# EAGLE board power (EAGLE 5.10)
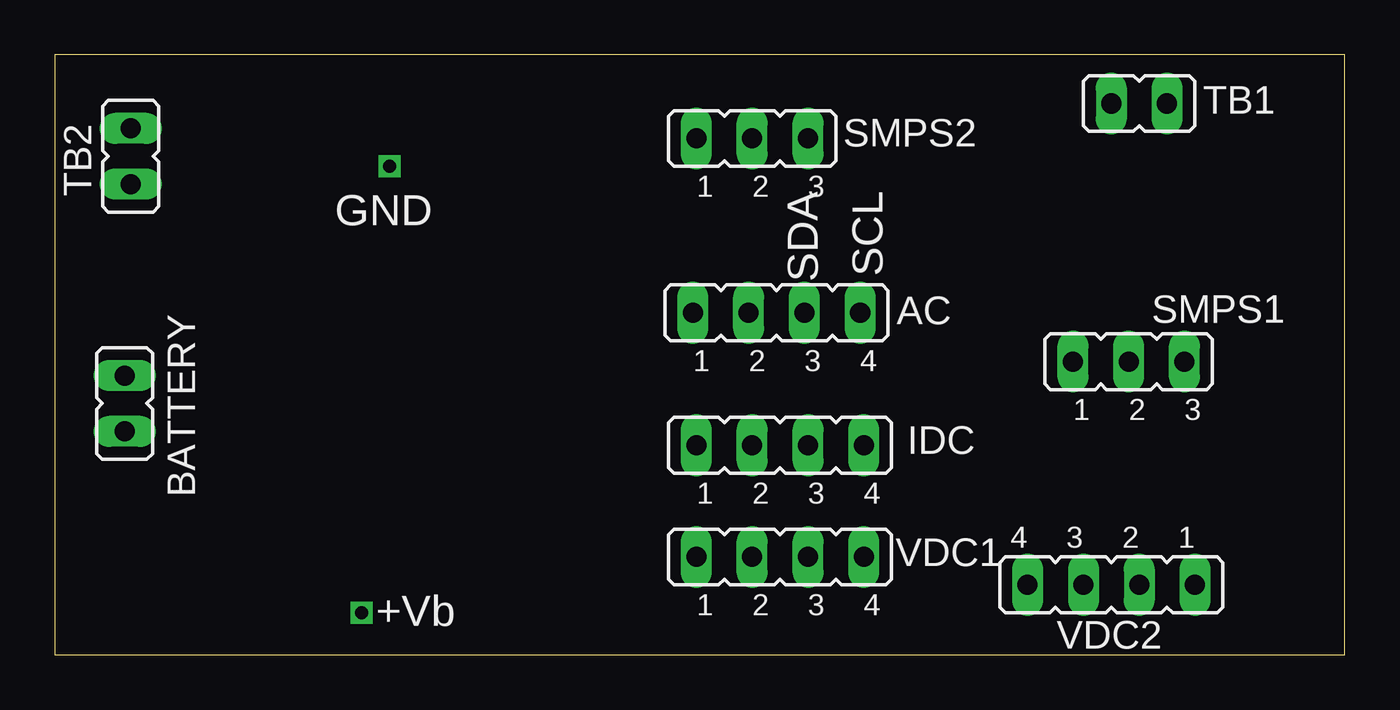
[diagram p0: board, top side]
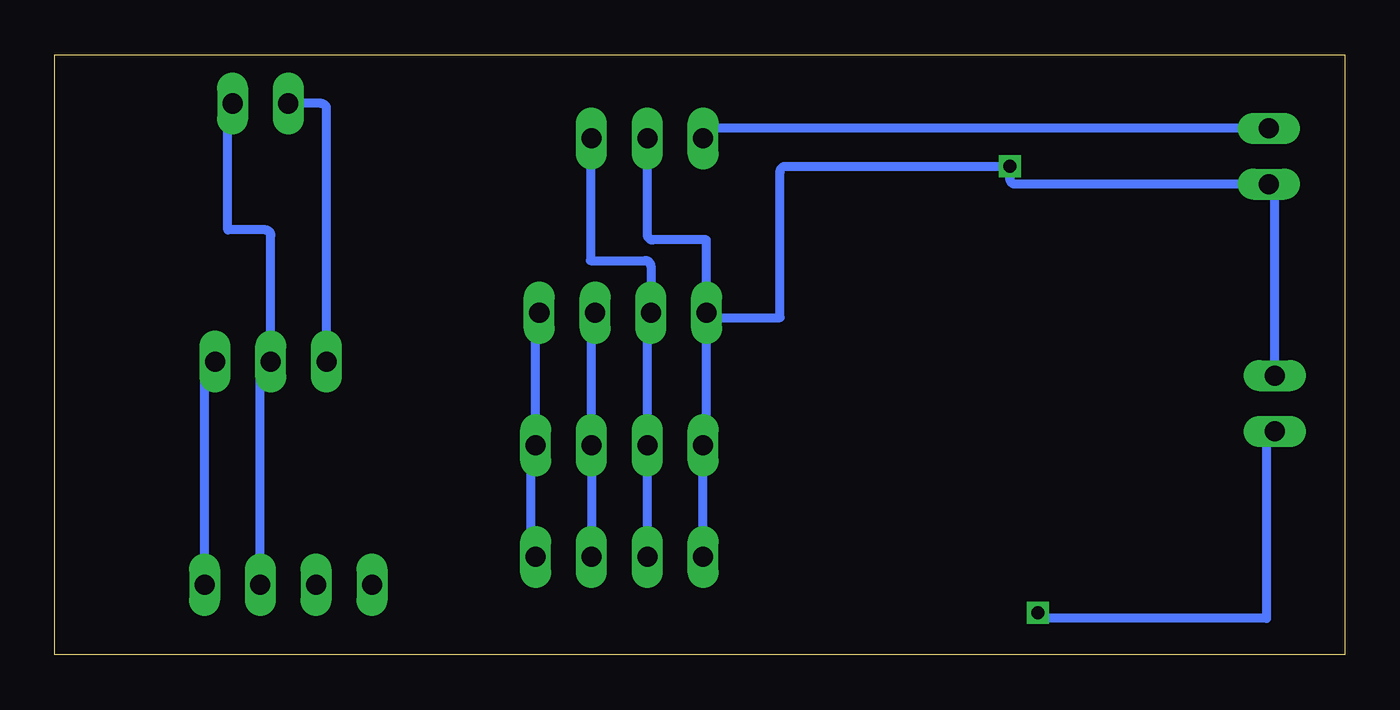
[diagram p1: board, bottom side, seen from below]

Size 58.73 x 27.3 mm. Coordinates in mm from the lower left corner, seen from the top.
Outline: 0,0 58.73,0 58.73,27.3 0,27.3 0,0
Copper layers (1*16): Top 0.035mm / dielectric 1.5mm / Bottom 0.035mm
Design rules "default": minimum track width 10mil, minimum drill 24mil, track to track 8mil, track to pad 8mil, pad to pad 8mil, via to via 8mil, smd to smd 8mil, copper to edge 40mil, drill to drill 8mil, minimum pad ring 10mil, minimum via ring 8mil, stop-mask expansion 4mil, vias tented up to drill 0mil, thermal gap 10mil

## Footprints (pad centres in the part's own frame; a part is rotated, then mirrored left to right if it is on the bottom)
JP4 = drill 0.914 long: 1 -3.81,0; 2 -1.27,0; 3 1.27,0; 4 3.81,0
JP1 = drill 0.914 long: 1 0,-1.27; 2 0,1.27
JP2 = drill 0.914 long: 1 -2.54,0; 2 0,0; 3 2.54,0

## Placement (x,y rotation side)
AC  [JP4]  32.86,15.55 0 top
BATTERY  [JP1]  3.17,11.43 180 top
IDC  [JP4]  33.02,9.53 0 top
SMPS1  [JP2]  48.9,13.34 0 top
SMPS2  [JP2]  31.75,23.5 0 top
TB1  [JP1]  49.37,25.09 270 top
TB2  [JP1]  3.45,22.68 180 top
VDC1  [JP4]  33.02,4.45 0 top
VDC2  [JP4]  48.1,3.17 180 top

## Library data of the parts
AC BATTERY IDC SMPS1 SMPS2 TB1 TB2 VDC1 VDC2 = jumper

## Nets
+5V/1: AC.2 IDC.2 SMPS2.3 VDC1.2
+5V/2: SMPS1.3 VDC2.1
+12V/1: SMPS2.1 TB2.1
+12V/2: SMPS1.1 TB1.1
GND1: AC.1 BATTERY.1 IDC.1 SMPS2.2 TB2.2 VDC1.1
GND2: SMPS1.2 TB1.2 VDC2.2
SCL: AC.4 IDC.4 VDC1.4
SDA: AC.3 IDC.3 VDC1.3
VB: BATTERY.2

## Tracks (layer width: path | path; a pad name or v marks a point on that pad's centre or on a via)
+5V/1
  Bottom 0.406: VDC1.2 IDC.2 31.75,15.39 arc90 AC.2 31.59,17.68 arc-90 31.84,17.93 34.34,17.93 34.34,23.44 arc90 SMPS2.3
+5V/2
  Bottom 0.406: SMPS1.3 51.66,13.34 arc-90 51.91,13.08 VDC2.1
+12V/1
  Bottom 0.406: TB2.1 28.96,23.95 arc-90 29.21,23.7 SMPS2.1
+12V/2
  Bottom 0.406: TB1.1 46.61,25.09 arc90 46.35,24.83 SMPS1.1
GND1  (via drill 0.6)
  Bottom 0.406: VDC1.1 IDC.1 arc-90 29.05,9.69 AC.1 | AC.1 arc90 29.06,15.56 29.06,18.87 31.5,18.87 arc90 31.75,19.13 SMPS2.2 | AC.1 arc-90 28.84,15.34 25.7,15.34 25.7,21.97 arc90 25.45,22.23 v15.24,22.23 15.24,21.67 arc-90 14.99,21.41 TB2.2 3.43,21.41 arc90 3.17,21.16 BATTERY.1
GND2
  Bottom 0.406: TB1.2 arc-90 50.85,24.87 50.85,19.33 49.15,19.33 arc90 48.9,19.07 SMPS1.2 49.12,13.34 arc-90 49.37,13.08 VDC2.2
SCL
  Bottom 0.406: AC.4 arc-90 36.83,15.39 IDC.4 arc-90 37.03,9.32 37.03,3.94 arc-90 36.83,4.14 VDC1.4
SDA
  Bottom 0.406: AC.3 arc-90 34.29,15.39 IDC.3 VDC1.3
VB  (via drill 0.6)
  Bottom 0.406: BATTERY.2 3.3,10.16 arc-90 3.56,9.91 3.56,1.65 13.72,1.65 arc90 v13.97,1.91

## Text on the board
tPlace: GND | SDA | SCL | +Vb